# Altium PCB Strobe.PcbDoc
Units mm, origin at the board's own origin, x right, y up, seen from the top; angles counter-clockwise.
Board outline 25 x 25 mm, 2 copper layers (Top Layer, Bottom Layer), stack 1.58 mm thick; 4 components, 7 nets, 28 pads, 0 vias.
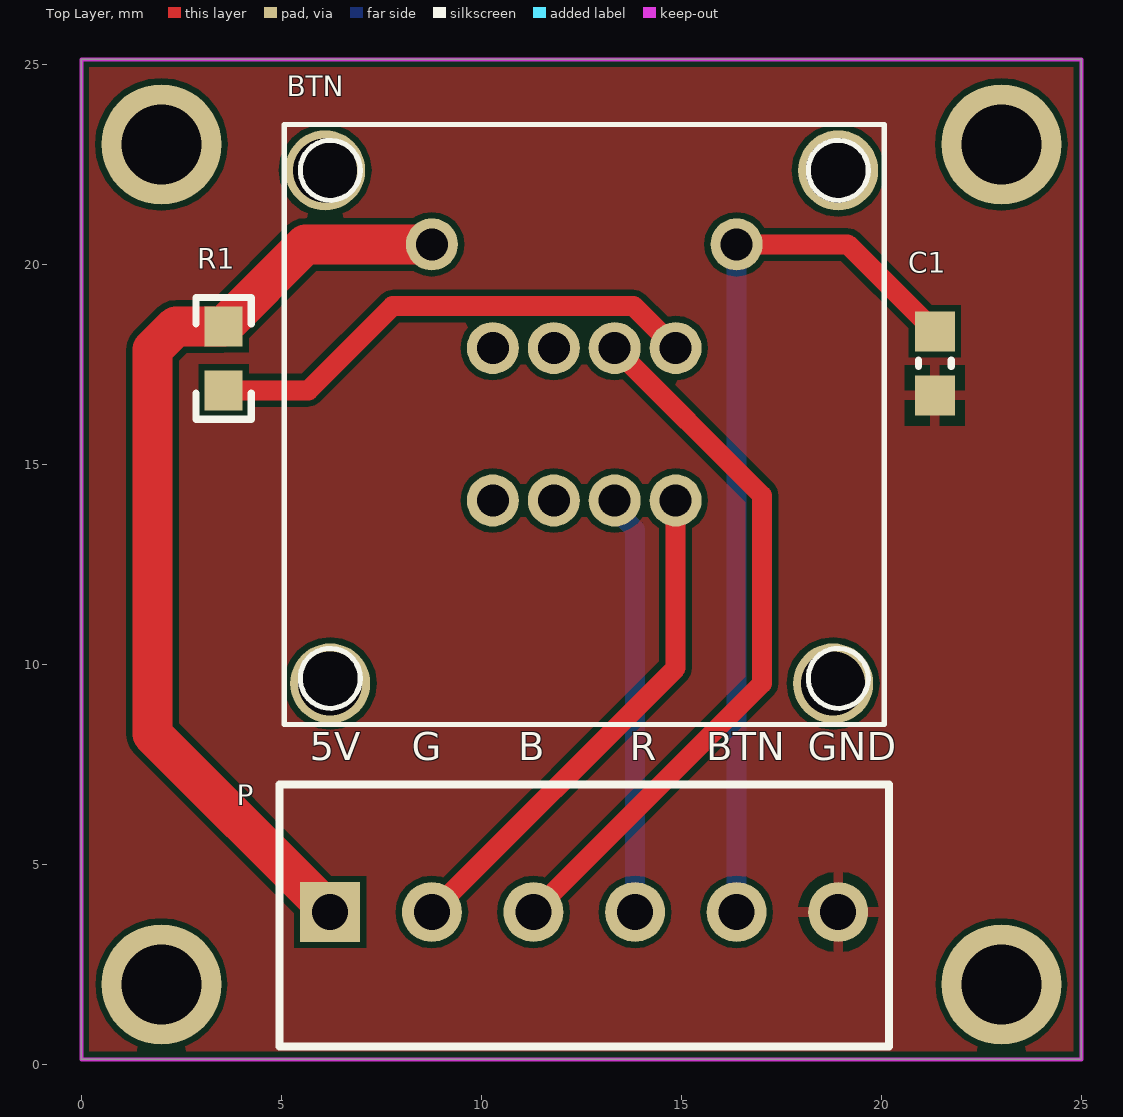
[diagram p0: Top Layer view]
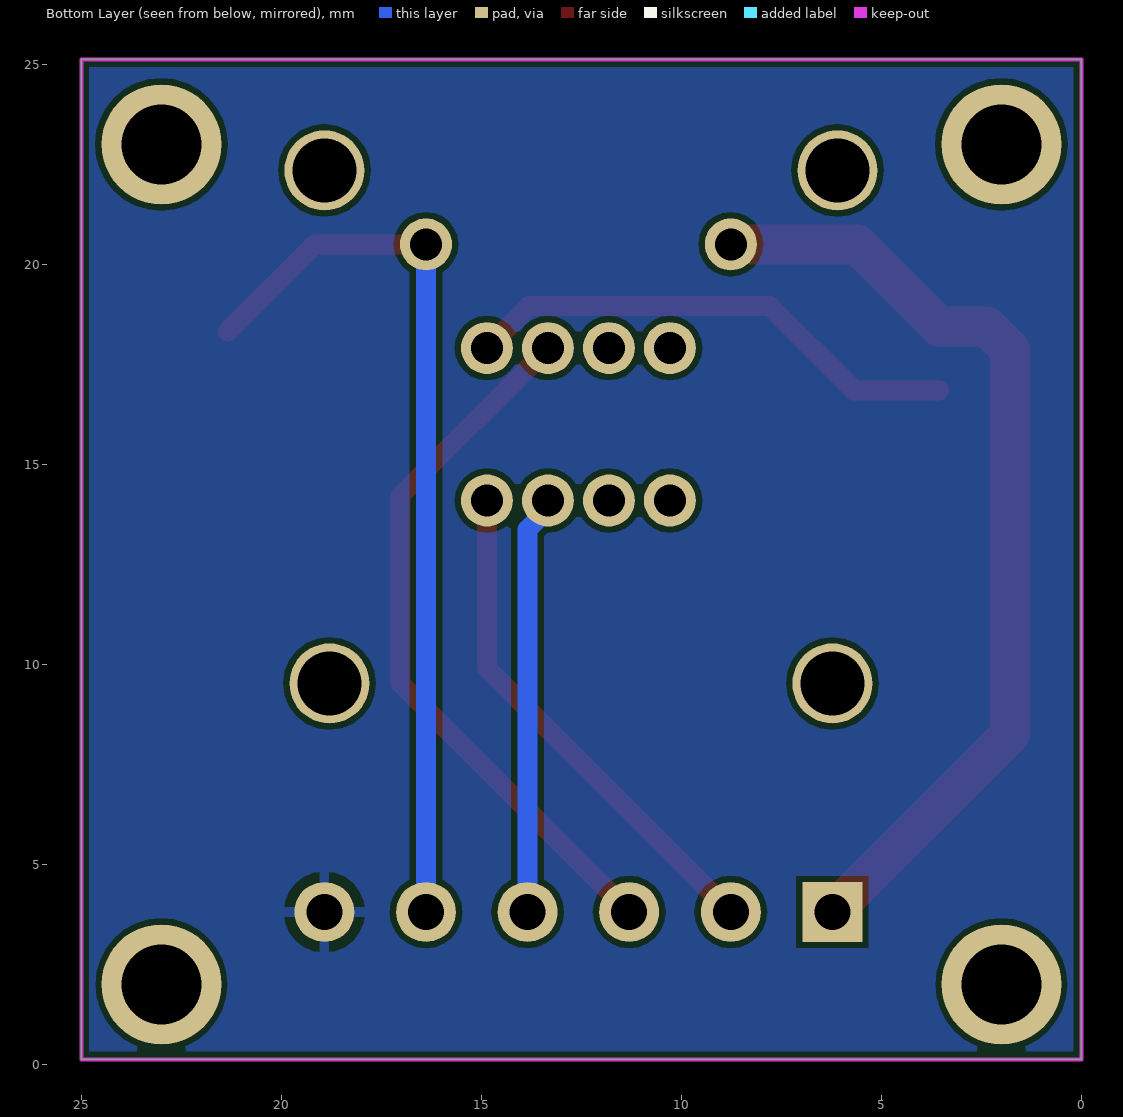
[diagram p1: Bottom Layer view, seen from below]
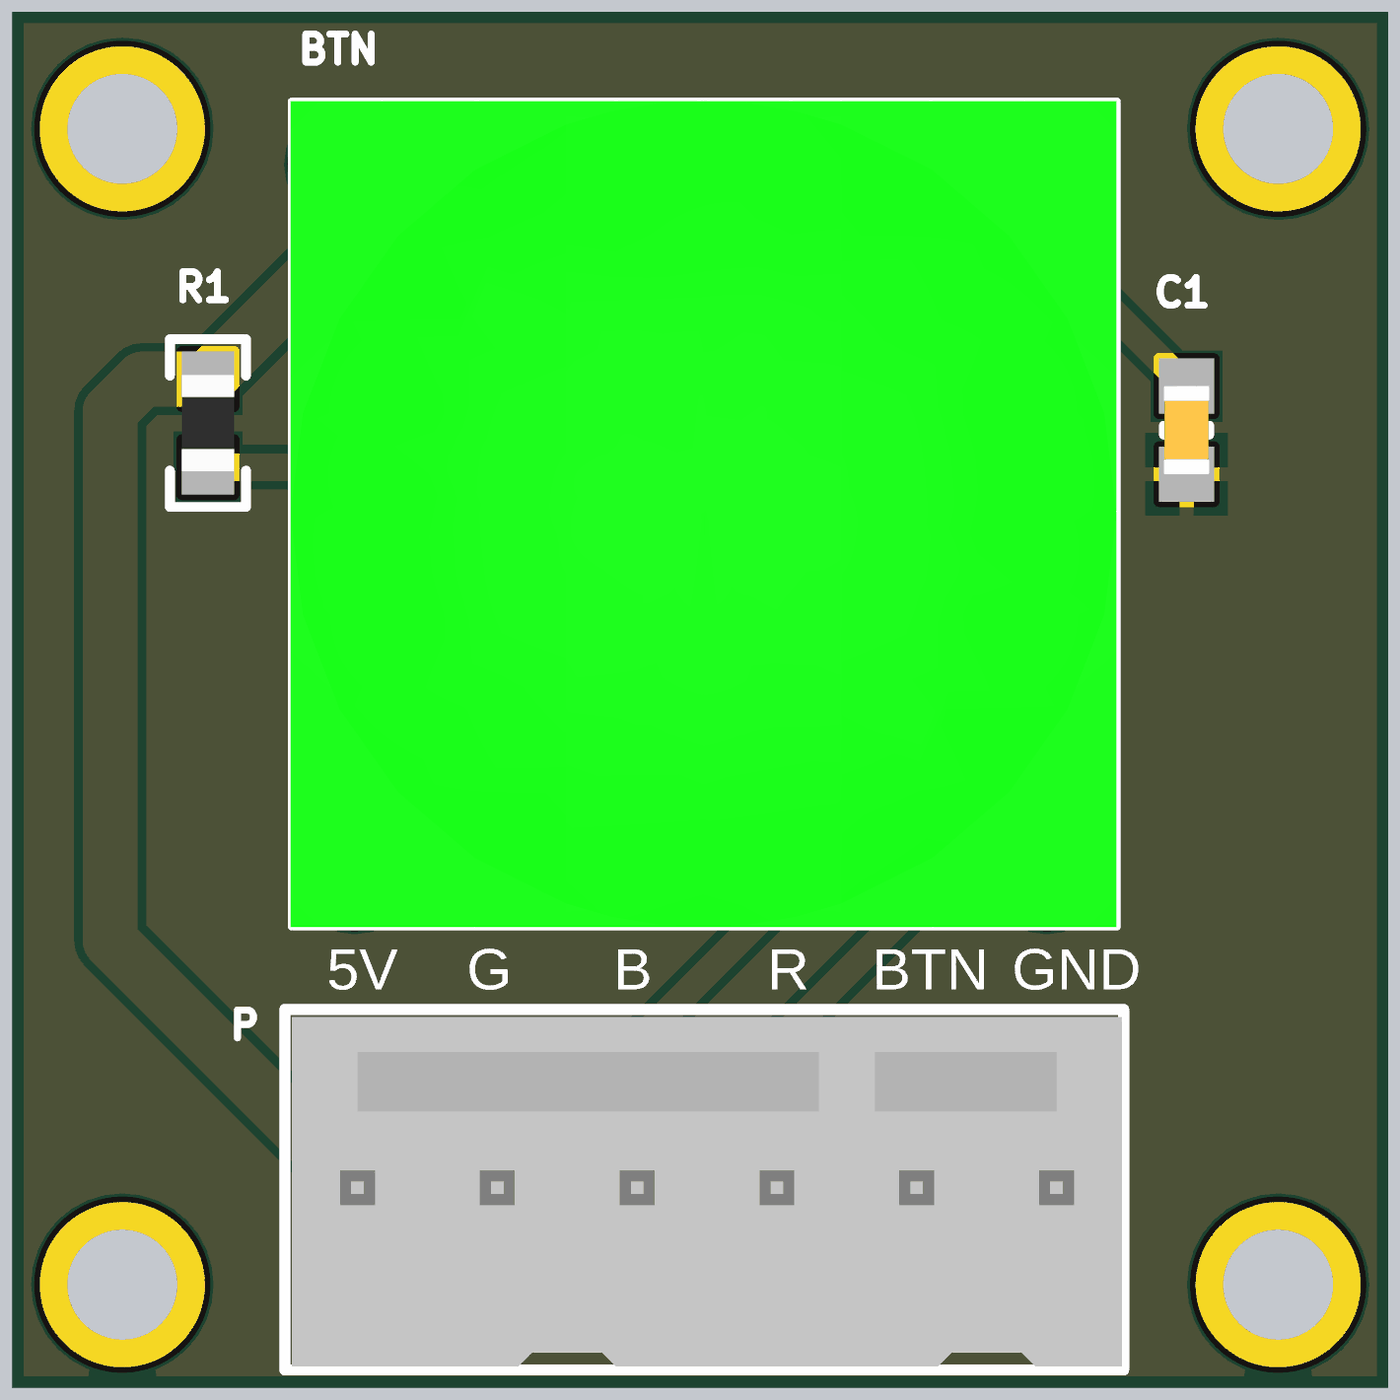
[diagram p2: 3D render of the assembled board from above, using the file's embedded part models]

## Layer stack, top to bottom
Top Solder: solder mask 0.0102, Solder Resist, Dk 3.5
Top Layer: signal copper 0.0356
Dielectric 1: dielectric 1.509, FR-4, Dk 4.8
Bottom Layer: signal copper 0.0356
Bottom Solder: solder mask 0.0102, Solder Resist, Dk 3.5

## Board outline
0,0.127 25,0.127 25,25.127 0,25.127

## Design rules (kind name [scope] priority, off if disabled: settings)
Clearance [All] p1: gap=0.15 ignorepadtopadclearanceinfootprint=FALSE
ComponentClearance [All] p1 off: gap=0.254 collisioncheckmode=3 verticalgap=2540 showdistances=FALSE
Height [All] p1: minheight=0 maxheight=100 prefheight=12.7
HoleSize [All] p1 off: absolutevalues=TRUE maxlimit=2.54 minlimit=0.025 maxpercent=80.000 minpercent=20.000
HoleToHoleClearance [All] p1 off: gap=0.254 allowstackedmicrovias=TRUE
MinimumSolderMaskSliver [All] p1 off: minsoldermaskwidth=0.254
PolygonConnect [All] p1: thpad.connectstyle=Relief thpad.reliefconductorwidth=0.254 thpad.reliefentries=4 thpad.polygonreliefangle="90 Angle" thpad.airgapwidth=0.254 smdpad.connectstyle=Relief smdpad.reliefconductorwidth=0.254 smdpad.reliefentries=4 smdpad.polygonreliefangle="90 Angle" smdpad.airgapwidth=0.254 via.connectstyle=Direct via.reliefconductorwidth=0.254 via.reliefentries=4 via.polygonreliefangle="90 Angle" via.airgapwidth=0.254
RoutingVias [All] p1: holewidth=0.3 width=0.5 viastyle="Through Hole" minholewidth=0.2 minwidth=0.4 maxholewidth=8 maxwidth=10
SilkToSilkClearance [All] p1 off: silktosilkclearance=0.254
SilkToSolderMaskClearance [IsPad] p1 off: minsilkscreentomaskgap=0.254 clearancetoexposedcopper=TRUE
SolderMaskExpansion SolderMaskExpansion_1 [IsVia] p1: expansion=0 soldermaskfromhole=TRUE
SolderMaskExpansion [All] p2: expansion=0.102
Width [All] p1: maxlimit=50 minlimit=0.2 preferedwidth=0.3
23 further rules are at their usual default settings.

## Components (designator, comment, footprint, x,y, rotation, side; value= is the part's Value field where it differs from the comment)
BTN "KP0115ANBKG03RGB-2SJB" KP0115ANBKG03RGB-2SJB 12.573,16.002 r0 top
C1 "0603" C0603 21.336,17.526 r90 top value=0.1uF
P "Header 6" "Molex HDR1X6" 6.223,3.81 r0 top
R1 "0603" R0603 3.556,17.653 r90 top value=330

## Footprints (in the part's own frame and the unit in brackets; to place one, negate y for a bottom-side part, rotate by r counter-clockwise, add the part's x,y. Pads: shape width x height; smd on the part's side, far side on the other; paste and mask are expansions set on the pad)
C0603 [mm] "0603_095"
  rect 1x1 smd: 1(-0.8,0) 2(0.8,0)
  silkscreen extent -0.08,-0.41 0.08,0.41, body extent -0.93,-0.41 0.93,0.41, height 0.81
KP0115ANBKG03RGB-2SJB [mm] "KP0115ANBKG03RGB-2SJB"
  round 1.3 hole 0.8: 1(-3.81,4.5) 1A(3.81,4.5) B(0.762,1.905) G(2.286,-1.905) MH(-2.286,-1.905) MH(-2.286,1.905) MH(-0.762,-1.905) MH(-0.762,1.905) R(0.762,-1.905) VCC(2.286,1.905)
  round 2 hole 1.6: MH(-6.477,6.35) MH(-6.35,-6.477) MH(6.223,-6.477) MH(6.35,6.35)
  silkscreen extent -7.5,-7.5 7.5,7.5, body extent -7.52,-7.51 7.49,7.51, height 23.11
"Molex HDR1X6" [mm] "Connector; Header; 6 Position"
  rect 1.5x1.5 hole 0.9: 1(0,0)
  round 1.5 hole 0.9: 2(2.54,0) 3(5.08,0) 4(7.62,0) 5(10.16,0) 6(12.7,0)
  silkscreen extent -1.27,-3.36 13.97,3.19, body extent -1.14,-3.3 13.94,3.05, height 11.58
R0603 [mm] "0603 from SM-752 data"
  rect 1x0.95 smd: 1(-0.8,0) 2(0.8,0)
  silkscreen extent -1.52,-0.69 1.52,0.69, body extent -0.87,-0.47 0.88,0.48, height 0.54

## Part data
BTN: "Pushbutton Switch SPST-NO Standard, Illuminated Through Hole", Current Rating=100mA, Illumination Color=Blue,Green,Red, Manufacturer 1="NKK Switches", Max Operating Temperature=50°C, Max Voltage Rating (DC)=12V, Min Operating Temperature=-25°C, Package Quantity=1, Supplier Part Number 1=360-2465-ND, Actuator Material=Polyacetal, Actuator Type="Square, Button", ComponentLink1Description=https://datasheet.ciiva.com/16864/70192969-16864678.pdf?src-supplier=Allied+Electronics, ComponentLink1URL=https://datasheet.ciiva.com/16864/70192969-16864678.pdf?src-supplier=Allied+Electronics, ComponentLink2Description=https://datasheet.ciiva.com/2870/kp01-2870071.pdf?src-supplier=Digi-Key, ComponentLink2URL=https://datasheet.ciiva.com/2870/kp01-2870071.pdf?src-supplier=Digi-Key, Contact Material="Stainless Steel", Contact Plating=Gold, Depth=17.4mm, Electrical Life=5000000Cycles, Housing Material="Glass fibre", Illumination Type=LED, Lead Free="Lead Free", Length=17.4mm, Manufacturer Part Number 1=KP0115ANBKG03RGB-2SJB, Max Current Rating=100mA, Mechanical Life=5000000Cycles, Mount="Through Hole", Packaging=Bulk, Pricing 1="1=20.27000, 10=18.40500, 25=17.57800, 50=16.64740, 100=16.02700, 250=14.99300, 500=12.40800 (USD)", RoHS=Yes, Stock 1=22, Supplier 1=Digi-Key, Switch Function=Off-Mom, Termination="PC Pins", Throw Configuration=SPST, Voltage Rating (DC)=12V
C1: library part Cap, "CAP CER 0.1UF 25V X7R 0402", ComponentLink1Description=https://datasheet.ciiva.com/30062/tmk212bbj106kg-t-30062083.pdf?src-supplier=Onlinecomponents.com, ComponentLink1URL=https://datasheet.ciiva.com/30062/tmk212bbj106kg-t-30062083.pdf?src-supplier=Onlinecomponents.com, ComponentLink2Description=https://datasheet.ciiva.com/139/mlcc-all-e-139570.pdf?src-supplier=Digi-Key, ComponentLink2URL=https://datasheet.ciiva.com/139/mlcc-all-e-139570.pdf?src-supplier=Digi-Key, ComponentLink3Description=https://datasheet.ciiva.com/139/mlcc-all-e-139571.pdf?src-supplier=Digi-Key, ComponentLink3URL=https://datasheet.ciiva.com/139/mlcc-all-e-139571.pdf?src-supplier=Digi-Key, ComponentLink4Description=https://datasheet.ciiva.com/139/mlcc-all-e-139572.pdf?src-supplier=Digi-Key, ComponentLink4URL=https://datasheet.ciiva.com/139/mlcc-all-e-139572.pdf?src-supplier=Digi-Key, ComponentLink5Description=https://datasheet.ciiva.com/7975/1481447-7975820.pdf?src-supplier=Element14, ComponentLink5URL=https://datasheet.ciiva.com/7975/1481447-7975820.pdf?src-supplier=Element14, ComponentLink6Description=https://datasheet.ciiva.com/144/mlccorderingcode-144037.pdf?src-supplier=Digi-Key, ComponentLink6URL=https://datasheet.ciiva.com/144/mlccorderingcode-144037.pdf?src-supplier=Digi-Key, ComponentLink7Description=https://datasheet.ciiva.com/8033/1489800-8033669.pdf?src-supplier=Element14, ComponentLink7URL=https://datasheet.ciiva.com/8033/1489800-8033669.pdf?src-supplier=Element14, ComponentLink8Description=https://datasheet.ciiva.com/15189/getdatasheetpartid-321421-15189125.pdf?src-supplier=Verical, ComponentLink8URL=https://datasheet.ciiva.com/15189/getdatasheetpartid-321421-15189125.pdf?src-supplier=Verical, ComponentLink9Description=https://datasheet.ciiva.com/144/mlccorderingcode-144038.pdf?src-supplier=Digi-Key, ComponentLink9URL=https://datasheet.ciiva.com/144/mlccorderingcode-144038.pdf?src-supplier=Digi-Key, ComponentLink10Description=https://datasheet.ciiva.com/28450/1489800-28450342.pdf?src-supplier=Element14, ComponentLink10URL=https://datasheet.ciiva.com/28450/1489800-28450342.pdf?src-supplier=Element14, ComponentLink11Description=https://datasheet.ciiva.com/144/mlccorderingcode-144039.pdf?src-supplier=Digi-Key, ComponentLink11URL=https://datasheet.ciiva.com/144/mlccorderingcode-144039.pdf?src-supplier=Digi-Key, ComponentLink12Description=https://datasheet.ciiva.com/8033/1489800-8033671.pdf?src-supplier=Element14, ComponentLink12URL=https://datasheet.ciiva.com/8033/1489800-8033671.pdf?src-supplier=Element14, ComponentLink13Description=http://www.farnell.com/datasheets/1872206.pdf?src-supplier=Farnell, ComponentLink13URL=http://www.farnell.com/datasheets/1872206.pdf?src-supplier=Farnell, ComponentLink14Description=http://uk.rs-online.com/webdocs/144c/0900766b8144c113.pdf?src-supplier=RSComponents, ComponentLink14URL=http://uk.rs-online.com/webdocs/144c/0900766b8144c113.pdf?src-supplier=RSComponents, ComponentLink15Description=http://www.farnell.com/datasheets/2048008.pdf?src-supplier=Farnell, ComponentLink15URL=http://www.farnell.com/datasheets/2048008.pdf?src-supplier=Farnell, ComponentLink16Description=http://www.mouser.com/ds/2/281/c02e-2905.pdf?src-supplier=Mouser, ComponentLink16URL=http://www.mouser.com/ds/2/281/c02e-2905.pdf?src-supplier=Mouser, ComponentLink17Description=http://components.arrow.com/part/dataview/0323_06361249?src-supplier=Arrow+Europe, ComponentLink17URL=http://components.arrow.com/part/dataview/0323_06361249?src-supplier=Arrow+Europe, ComponentLink18Description=https://search.murata.co.jp/Ceramy/image/img/A01X/G101/ENG/GRM155R71E104KE14-01.pdf?src-supplier=Digi-Key, ComponentLink18URL=https://search.murata.co.jp/Ceramy/image/img/A01X/G101/ENG/GRM155R71E104KE14-01.pdf?src-supplier=Digi-Key, ComponentLink19Description=http://www.farnell.com/datasheets/2048008.pdf?src-supplier=Newark, ComponentLink19URL=http://www.farnell.com/datasheets/2048008.pdf?src-supplier=Newark, ComponentLink20Description=http://psearch.en.murata.com/capacitor/product/GRM155R71E104KE14%23.pdf?src-supplier=Avnet, ComponentLink20URL=http://psearch.en.murata.com/capacitor/product/GRM155R71E104KE14%23.pdf?src-supplier=Avnet, ComponentLink21Description=http://www.farnell.com/datasheets/2048008.pdf?src-supplier=Element14, ComponentLink21URL=http://www.farnell.com/datasheets/2048008.pdf?src-supplier=Element14
P: "CONN HEADER VERT 6POS 2.54MM", Color=White, Contact Resistance=10mR, Current Rating=4A, Flammability Rating="UL94 V-0", Housing Color=Orange, Insulation Resistance=500GR, Manufacturer 1=Molex, Manufacturer Part Number 1=22-23-2061, Max Current Rating=7A, Max Operating Temperature=75°C, Max Voltage Rating (AC)=600V, Min Operating Temperature=0°C, Package Quantity=1000, Supplier Part Number 1=WM4204-ND, Voltage Rating=250V, Approvals=UL,CSA, ComponentLink1Description=https://datasheet.ciiva.com/5158/0022232061-pcb-headers-227101-5158944.pdf?src-supplier=Mouser, ComponentLink1URL=https://datasheet.ciiva.com/5158/0022232061-pcb-headers-227101-5158944.pdf?src-supplier=Mouser, ComponentLink2Description=https://datasheet.ciiva.com/10086/0022232061-pcb-headers-10086340.pdf?src-supplier=Avnet, ComponentLink2URL=https://datasheet.ciiva.com/10086/0022232061-pcb-headers-10086340.pdf?src-supplier=Avnet, ComponentLink3Description=https://datasheet.ciiva.com/11746/0900766b80d8f4d1-11746779.pdf?src-supplier=RSComponents, ComponentLink3URL=https://datasheet.ciiva.com/11746/0900766b80d8f4d1-11746779.pdf?src-supplier=RSComponents, ComponentLink4Description=https://datasheet.ciiva.com/19462/1966261-19462363.pdf?src-supplier=Jameco, ComponentLink4URL=https://datasheet.ciiva.com/19462/1966261-19462363.pdf?src-supplier=Jameco, ComponentLink5Description=https://datasheet.ciiva.com/19460/232303-19460895.pdf?src-supplier=Jameco, ComponentLink5URL=https://datasheet.ciiva.com/19460/232303-19460895.pdf?src-supplier=Jameco, ComponentLink6Description=https://datasheet.ciiva.com/26844/getdatasheetpartid-256364-26844021.pdf?src-supplier=Verical, ComponentLink6URL=https://datasheet.ciiva.com/26844/getdatasheetpartid-256364-26844021.pdf?src-supplier=Verical, ComponentLink7Description=https://datasheet.ciiva.com/16468/0022232061-pcb-headers-16468934.pdf?src-supplier=Avnet+Asia, ComponentLink7URL=https://datasheet.ciiva.com/16468/0022232061-pcb-headers-16468934.pdf?src-supplier=Avnet+Asia, ComponentLink8Description=https://datasheet.ciiva.com/16658/0022232061-pcb-headers-16658169.pdf?src-supplier=Avnet+Europe, ComponentLink8URL=https://datasheet.ciiva.com/16658/0022232061-pcb-headers-16658169.pdf?src-supplier=Avnet+Europe, ComponentLink9Description=https://datasheet.ciiva.com/30075/16920022232061-pcb-headers-30075692.pdf?src-supplier=Onlinecomponents.com, ComponentLink9URL=https://datasheet.ciiva.com/30075/16920022232061-pcb-headers-30075692.pdf?src-supplier=Onlinecomponents.com, Contact Material="Brass,Copper Alloy", Contact Plating=Tin,Copper, Depth=9.02mm, Gender=Male, Glow Wire Compliant=Non-compliant, Halogen Free="Low Halogen", Height=18.42mm, Housing Material=Nylon, LatestRevisionDate=17-Jul-2002, LatestRevisionNote="Re-released for DXP Platform.", Lead Free="Lead Free", Length=31.7mm, Mount="Through Hole,Cable", Number of Circuits=6, Number of Contacts=6, Number of Positions=6, Number of Rows=1, Orientation=Straight, Packaging=Bulk, Pitch=2.54mm, Pricing 1="1=0.43000, 10=0.40300, 100=0.28180, 500=0.24150, 1000=0.20125, 5000=0.17250, 10000=0.16100 (USD)", Publisher="Altium Limited", Radiation Hardening=No, REACH SVHC=Unknown, RoHS=Yes, Stock 1=22943, Supplier 1=Digi-Key, Termination="Through Hole", Voltage Rating (DC)=250V
R1: library part Res1, "RES SMD 330 OHM 1% 1/10W 0603", Case Code (Metric)=1608, Manufacturer 1=Yageo, Manufacturer Part Number 1=RC0603FR-07330RL, Max Operating Temperature=155°C, Max Power Dissipation=100mW, Min Operating Temperature=-55°C, Package Quantity=1, Resistance=330R, Supplier Part Number 1=311-330HRCT-ND, Temperature Coefficient=100ppm/°C, Tolerance=1%, Voltage Rating=50V, Case/Package=0603, Case Code (Imperial)=0603, ComponentLink1Description=https://datasheet.ciiva.com/11819/0900766b80c66297-11819490.pdf?src-supplier=RSComponents, ComponentLink1URL=https://datasheet.ciiva.com/11819/0900766b80c66297-11819490.pdf?src-supplier=RSComponents, ComponentLink2Description=https://datasheet.ciiva.com/7849/1018594-7849962.pdf?src-supplier=Element14, ComponentLink2URL=https://datasheet.ciiva.com/7849/1018594-7849962.pdf?src-supplier=Element14, ComponentLink3Description=https://datasheet.ciiva.com/17083/pyu-rc0402-51-rohs-l-6-r-17083994.pdf?src-supplier=Future+Electronics, ComponentLink3URL=https://datasheet.ciiva.com/17083/pyu-rc0402-51-rohs-l-6-r-17083994.pdf?src-supplier=Future+Electronics, ComponentLink4Description=https://datasheet.ciiva.com/7849/1018594-7849963.pdf?src-supplier=Element14, ComponentLink4URL=https://datasheet.ciiva.com/7849/1018594-7849963.pdf?src-supplier=Element14, ComponentLink5Description=https://datasheet.ciiva.com/2453/pyu-r-int-thick-7-2453661.pdf?src-supplier=Digi-Key, ComponentLink5URL=https://datasheet.ciiva.com/2453/pyu-r-int-thick-7-2453661.pdf?src-supplier=Digi-Key, ComponentLink6Description=https://datasheet.ciiva.com/2453/pyu-r-int-thick-7-2453662.pdf?src-supplier=Digi-Key, ComponentLink6URL=https://datasheet.ciiva.com/2453/pyu-r-int-thick-7-2453662.pdf?src-supplier=Digi-Key, ComponentLink7Description=https://datasheet.ciiva.com/2453/pyu-r-int-thick-7-2453663.pdf?src-supplier=Digi-Key, ComponentLink7URL=https://datasheet.ciiva.com/2453/pyu-r-int-thick-7-2453663.pdf?src-supplier=Digi-Key, ComponentLink8Description=https://datasheet.ciiva.com/12656/pyu-rc0402-51-rohs-l-6-r-12656815.pdf?src-supplier=Mouser, ComponentLink8URL=https://datasheet.ciiva.com/12656/pyu-rc0402-51-rohs-l-6-r-12656815.pdf?src-supplier=Mouser, ComponentLink9Description=https://datasheet.ciiva.com/11819/0900766b80f96399-11819327.pdf?src-supplier=RSComponents, ComponentLink9URL=https://datasheet.ciiva.com/11819/0900766b80f96399-11819327.pdf?src-supplier=RSComponents, ComponentLink10Description=https://datasheet.ciiva.com/2454/pyu-r-int-thick-7-2454864.pdf?src-supplier=Digi-Key, ComponentLink10URL=https://datasheet.ciiva.com/2454/pyu-r-int-thick-7-2454864.pdf?src-supplier=Digi-Key, ComponentLink11Description=https://datasheet.ciiva.com/2454/pyu-r-int-thick-7-2454865.pdf?src-supplier=Digi-Key, ComponentLink11URL=https://datasheet.ciiva.com/2454/pyu-r-int-thick-7-2454865.pdf?src-supplier=Digi-Key, ComponentLink12Description=https://datasheet.ciiva.com/2454/pyu-r-int-thick-7-2454866.pdf?src-supplier=Digi-Key, ComponentLink12URL=https://datasheet.ciiva.com/2454/pyu-r-int-thick-7-2454866.pdf?src-supplier=Digi-Key, ComponentLink13Description=https://datasheet.ciiva.com/12555/rc0603-272842-12555334.pdf?src-supplier=Mouser, ComponentLink13URL=https://datasheet.ciiva.com/12555/rc0603-272842-12555334.pdf?src-supplier=Mouser, ComponentLink14Description=https://datasheet.ciiva.com/46440/1868787-46440904.pdf?src-supplier=Element14, ComponentLink14URL=https://datasheet.ciiva.com/46440/1868787-46440904.pdf?src-supplier=Element14, ComponentLink15Description=https://datasheet.ciiva.com/7746/443971-7746329.pdf?src-supplier=Element14, ComponentLink15URL=https://datasheet.ciiva.com/7746/443971-7746329.pdf?src-supplier=Element14, ComponentLink16Description=https://datasheet.ciiva.com/7746/443971-7746330.pdf?src-supplier=Element14, ComponentLink16URL=https://datasheet.ciiva.com/7746/443971-7746330.pdf?src-supplier=Element14, ComponentLink17Description=https://datasheet.ciiva.com/7746/1686128-7746331.pdf?src-supplier=Element14, ComponentLink17URL=https://datasheet.ciiva.com/7746/1686128-7746331.pdf?src-supplier=Element14, Composition="Thick Film", Depth=0.8mm, Features="Moisture Resistant", Height=0.45mm, Lead Free="Lead Free", Length=1.6mm, Number of Pins=2, Number of Terminations=2, Packaging="Tape and Reel", Power Rating=100mW, Pricing 1="1=0.10000, 10=0.02300, 100=0.00940, 1000=0.00421, 2500=0.00366 (USD)", REACH SVHC="No SVHC", RoHS=Yes, Stock 1=3885547, Supplier 1=Digi-Key, Termination=SMD/SMT, Voltage Rating (DC)=50V, Width=0.8mm

## Free pads (board coordinates)
  round 3 hole 2: ""(2,2) ""(2,23) ""(23,2) ""(23,23)

## Nets (pads, with @x,y where several pads share a name; then routed paths per layer and width w, separated by ;. In a path a pad name is that pad's centre, name@x,y a point inside that pad or via, vN(x,y) a via of type N, cw(c..) or ccw(c..) an arc to the next point about the centre after c; other vN are vias at no path point)
5V: BTN.1 P.1 R1.2 | length 24
  Top Layer w1: P.1 1.778,8.255 1.778,17.867 2.364,18.453 R1.2 5.605,20.502 BTN.1
BUTTON: BTN.1A C1.2 P.5 | length 22.5
  Top Layer w0.5: BTN.1A 19.16,20.502 C1.2
  Bottom Layer w0.5: P.5 BTN.1A
BUTTONB: BTN.B P.3 | length 18
  Top Layer w0.5: P.3 17.018,9.525 17.018,14.224 BTN.B
BUTTONG: BTN.G P.2 | length 12.8
  Top Layer w0.5: P.2 14.859,9.906 BTN.G
BUTTONR: BTN.R P.4 | length 10.5
  Bottom Layer w0.5: BTN.R 13.335,13.881 13.843,13.373 P.4
GND: C1.1 P.6
NetBTN_VCC: BTN.VCC R1.1 | length 12.6
  Top Layer w0.5: R1.1 5.677,16.853 7.781,18.957 13.809,18.957 BTN.VCC
pads on no net: BTN.MH

## Polygon pours and split planes (outlines as drawn)
GND on Top Layer "Top Layer-GND" (solid, remove dead copper, pour order 0): 0,0.127 0,25.273 25.019,25.273 25.019,-0.127
GND on Bottom Layer "Bottom Layer-GND" (solid, remove dead copper, pour order 2): 0,25.127 0,0.127 25,0.127 25,25.127

## Keep-outs
Keep-Out Layer:
  the board outline again, w0.1

## Silkscreen, mask and mechanical layers (free items; w line width, h text height)
Top Overlay:
  text "5V" at 5.715,7.366 h1.2
  text "G" at 8.255,7.366 h1.2
  text "B" at 10.922,7.366 h1.2
  text "R" at 13.716,7.366 h1.2
  text "BTN" at 15.621,7.366 h1.2
  text "GND" at 18.161,7.366 h1.2